# Allegro board sh-z-003_nc.brd
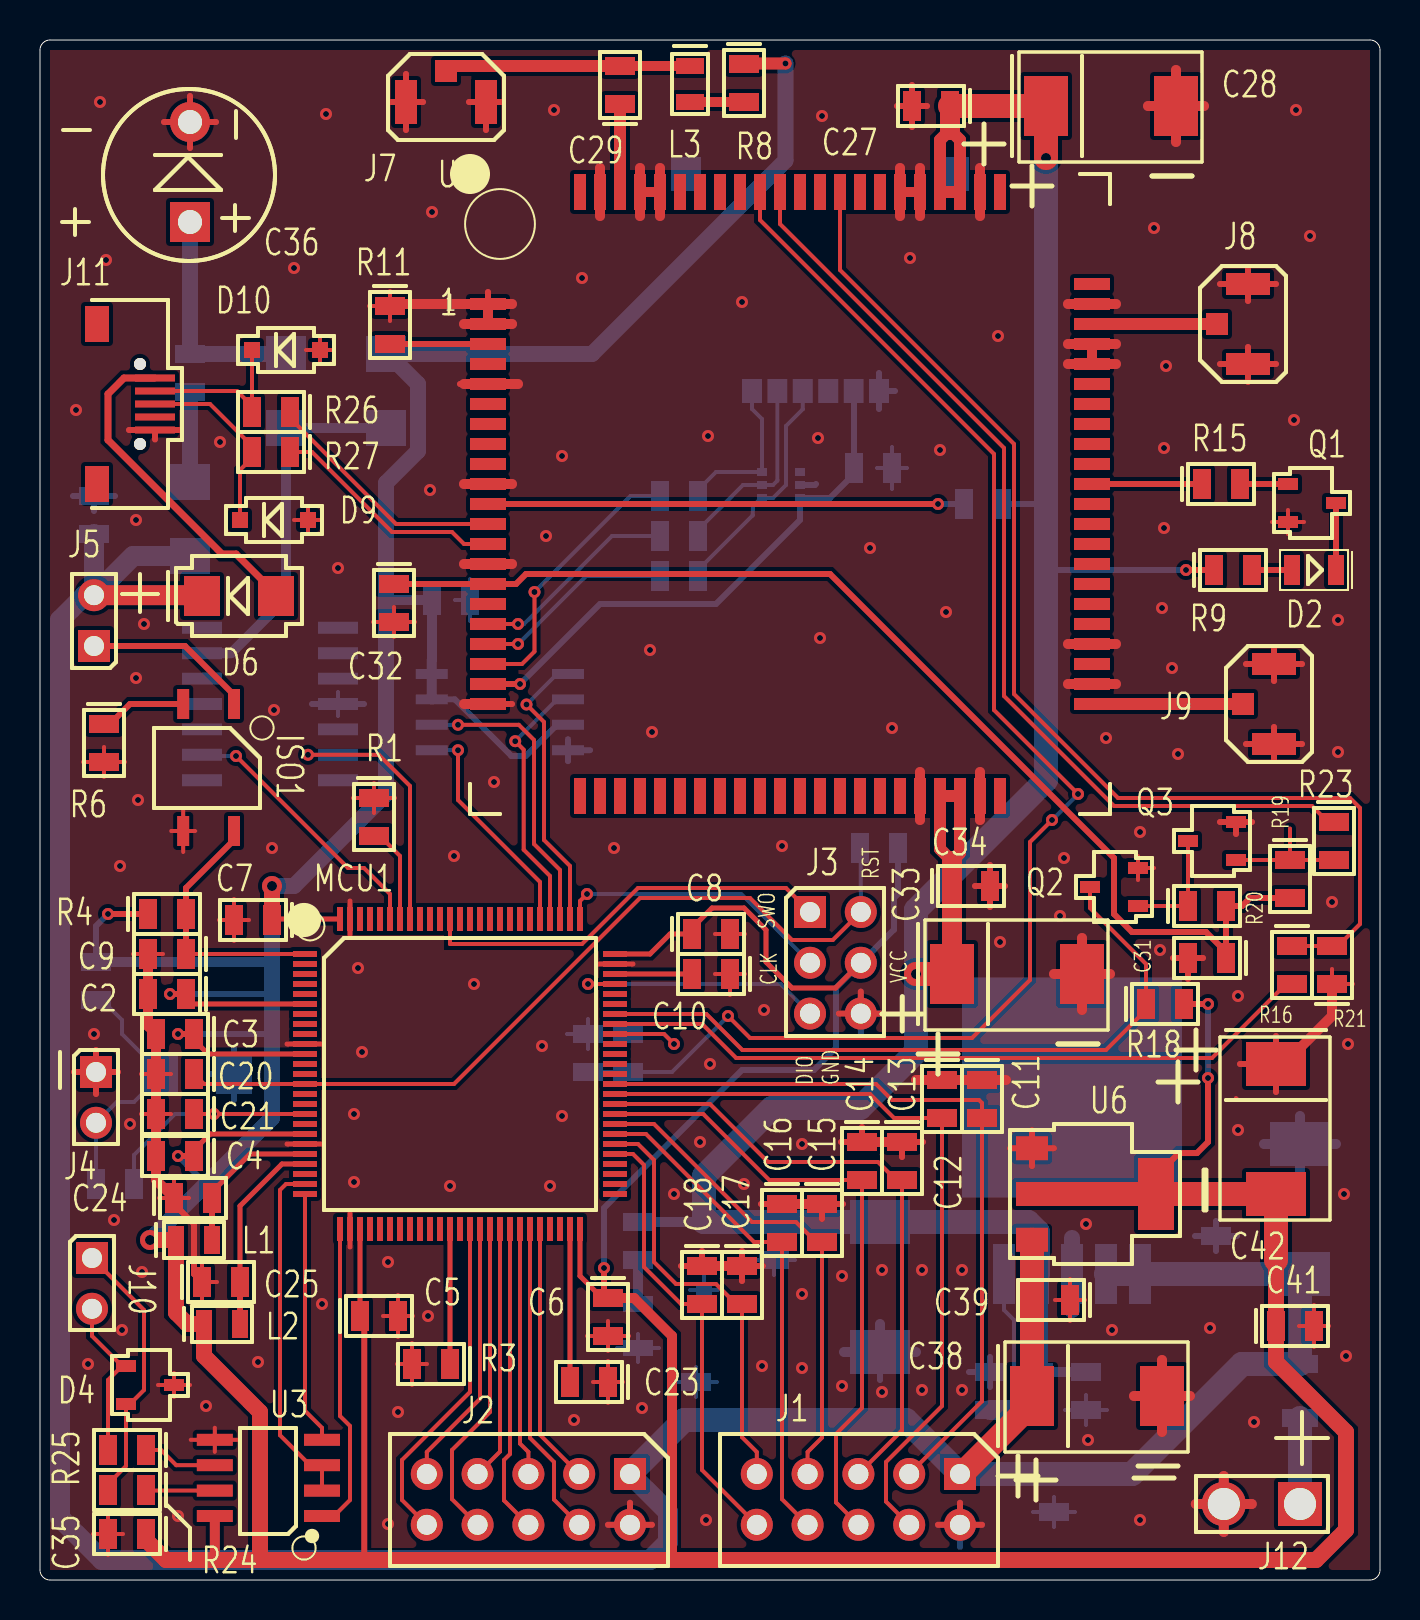
[diagram p0: board, top side]
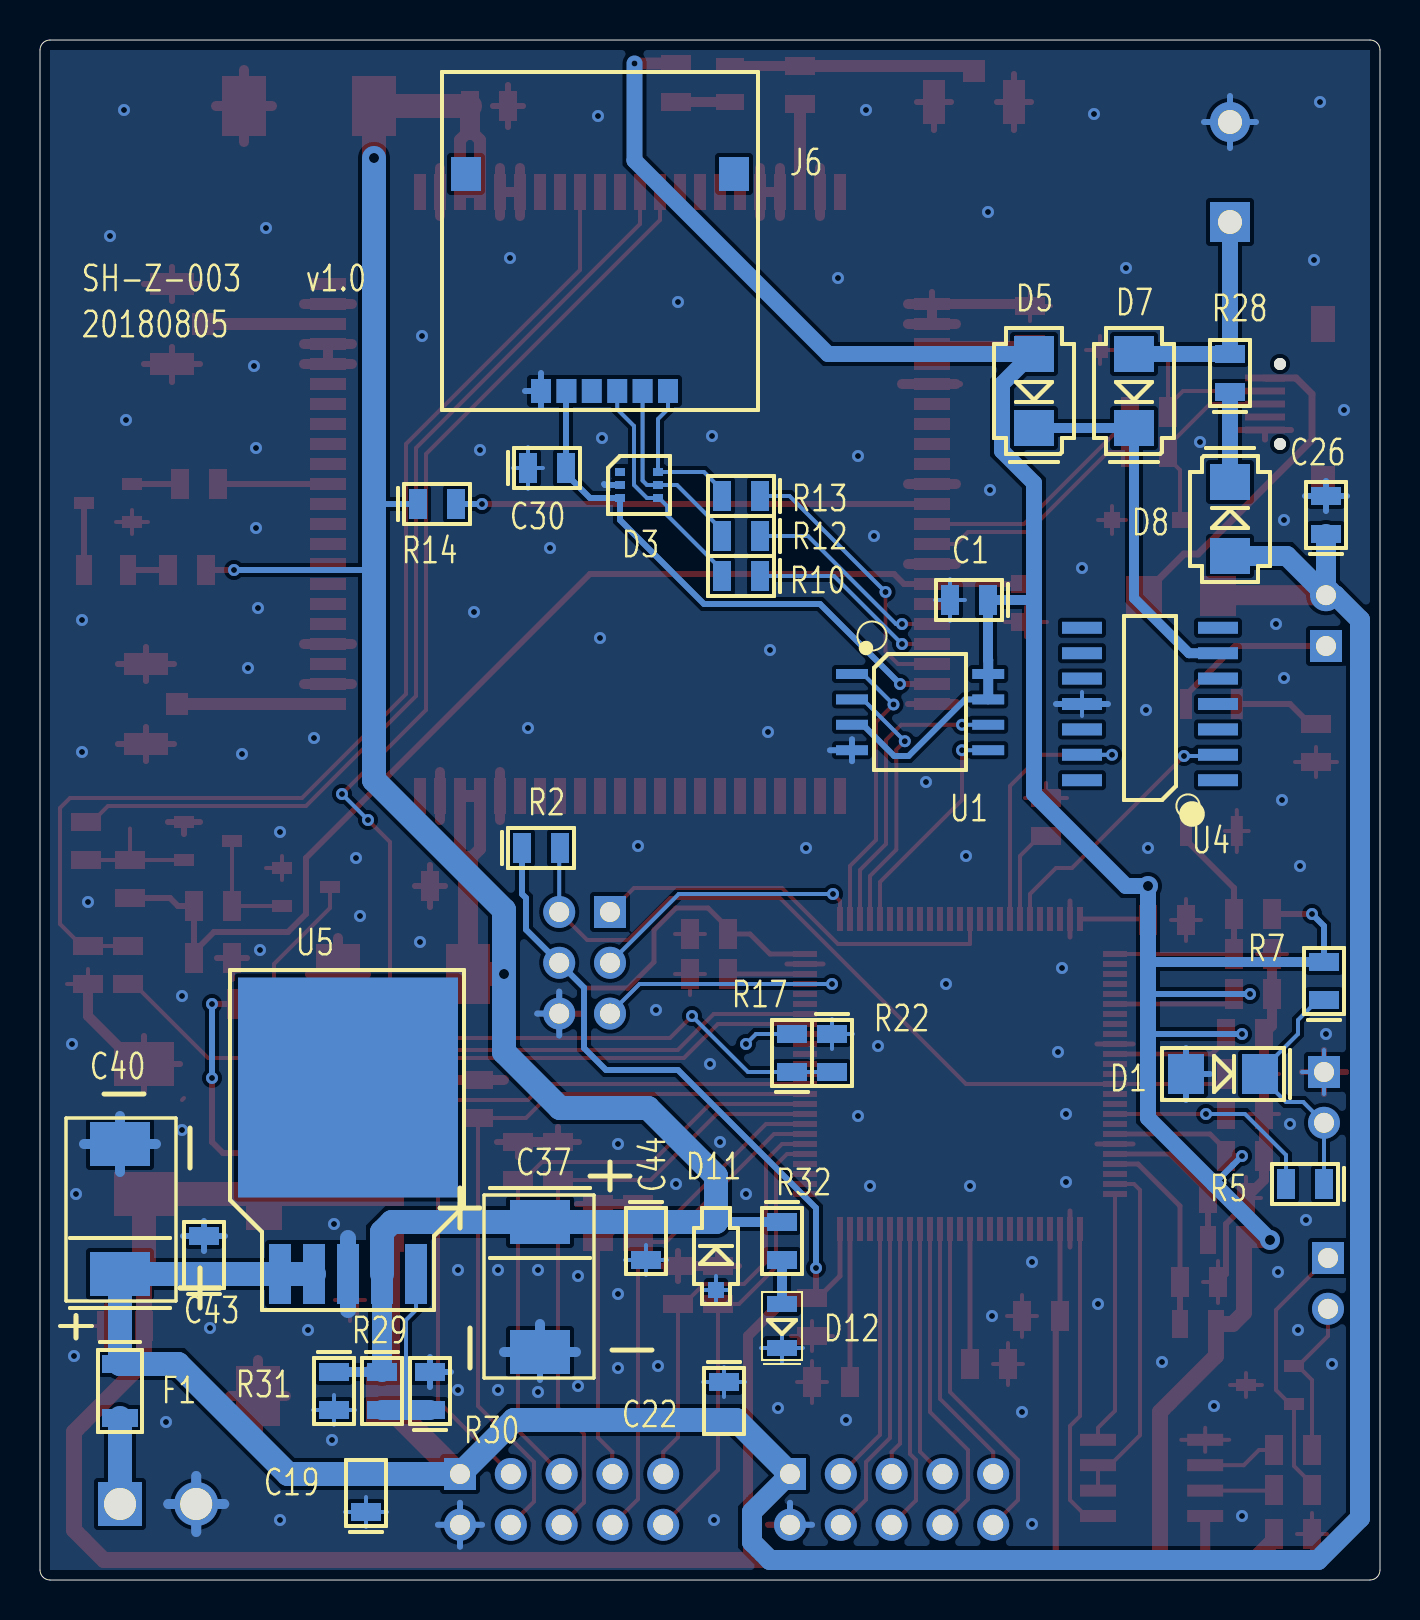
[diagram p1: board, bottom side, seen from below]

Outline 67 x 77 mm; copper layers: TOP, BOTTOM. Coordinates in mm from the lower left corner of the outline.
Outline path: 0,76.5 0,0.5 arc(0.15,0.15) 0.5,0 66.5,0 arc(66.85,0.15) 67,0.5 67,76.5 arc(66.85,76.85) 66.5,77 0.5,77 arc(0.15,76.85) 0,76.5

## Design rules (mm)
constraint set DEFAULT: 

## Placement (name value [footprint] x y rotation side)
C1  100nF  [SMD_C_0805]  19.6 49 270 bottom
C2  100nF  [SMD_C_0805]  7.3 29.3 270 top
C3  100nF  [SMD_C_0805]  7.7 27.3 270 top
C4  100nF  [SMD_C_0805]  7.7 21.2 270 top
C5  100nF  [SMD_C_0805]  16 13.2 90 top
C6  100nF  [SMD_C_0805]  28.4 14.1 0 top
C7  100nF  [SMD_C_0805]  11.6 33 270 top
C8  100nF  [SMD_C_0805]  32.6 32.3 90 top
C9  100nF  [SMD_C_0805]  7.3 31.3 270 top
C10  10uF  [SMD_C_0805]  34.5 30.3 270 top
C11  100nF  [SMD_C_0805]  47.1 25 0 top
C12  100nF  [SMD_C_0805]  45.1 25 0 top
C13  100nF  [SMD_C_0805]  43.1 21.9 0 top
C14  100nF  [SMD_C_0805]  41.1 21.9 0 top
C15  100nF  [SMD_C_0805]  39.1 18.8 0 top
C16  100nF  [SMD_C_0805]  37.1 18.8 0 top
C17  100nF  [SMD_C_0805]  35.1 15.7 0 top
C18  100nF  [SMD_C_0805]  33.1 15.7 0 top
C19  10uF  [SMD_C_0805]  50.7 3.4 0 bottom
C20  100nF  [SMD_C_0805]  7.7 25.3 270 top
C21  100nF  [SMD_C_0805]  7.7 23.3 270 top
C22  10uF  [SMD_C_0805]  32.8 9.9 180 bottom
C23  10uF  [SMD_C_0805]  28.4 9.9 270 top
C24  100nF  [SMD_C_0805]  6.7 19.1 90 top
C25  100nF  [SMD_C_0805]  8.1 14.9 90 top
C26  1uF  [SMD_C_0805]  2.7 52.3 0 bottom
C27  1uF  [SMD_C_0805]  45.5 73.7 270 top
C28  330uF  [SMD_C_P_7343]  55.6 73.7 90 top
C29  33pF  [SMD_C_0805]  29 73.8 180 top
C30  100nF  [SMD_C_0805]  42.6 55.6 90 bottom
C31  100nF  [SMD_C_0805]  59.3 31.1 270 top
C32  10uF  [SMD_C_0805]  17.7 49.8 0 top
C33  330uF  [SMD_C_P_7343]  50.9 30.3 90 top
C34  100nF  [SMD_C_0805]  45.6 34.7 90 top
C35  100nF  [SMD_C_0805]  5.3 2.3 270 top
C36  1F/5.5V  [DIP_2P_5MM]  7.5 67.9 90 top
C37  330uF  [SMD_C_P_7343]  42 12.6 180 bottom
C38  100uF  [SMD_C_P_7343]  54.9 9.2 90 top
C39  100nF  [SMD_C_0805]  51.5 14 270 top
C40  100uF  [SMD_C_P_7343]  63 20.6 0 bottom
C41  100nF  [SMD_C_0805]  61.8 12.7 90 top
C42  330uF  [SMD_C_P_7343]  61.8 20.5 0 top
C43  1uF  [SMD_C_0805]  58.8 15.3 0 bottom
C44  100nF  [SMD_C_0805]  36.7 17.9 180 bottom
D1  SMAJ6.5CA  [DO-214AC]  6 25.3 270 bottom
D2  GREEN  [SMD_D_0805]  64.7 50.5 270 top
D3  SMF05C  [SOT-363]  38 55.4 180 bottom
D4  SM712  [SOT23_D]  4.4 10.7 270 top
D5  SS32F  [SMAF]  17.3 57.6 0 bottom
D6  SS32F  [SMAF]  8.1 49.2 90 top
D7  SS32F  [SMAF]  12.3 57.6 0 bottom
D8  SS32F  [SMAF]  7.5 54.9 180 bottom
D9  5.1V  [SOD123]  10 53 90 top
D10  5.1V  [SOD123]  10.6 61.5 90 top
D11  5.1V  [SOD123]  33.2 17.9 180 bottom
D12  RED  [SMD_D_0805]  29.9 11.7 0 bottom
F1  2A  [SMD_R_1206]  63 10.8 180 bottom
ISO1  EL357NB  [EL357N]  9.7 43.8 270 top
J1  DI  [C2X5]  46 5.3 270 top
J2  Relay  [C2X5]  29.5 5.3 270 top
J3  SWD  [C2X3]  38.5 33.4 0 top
J4  ELS  [C1X2NEW]  2.8 25.4 0 top
J5  DOOR  [C1X2NEW]  2.7 46.7 180 top
J6  MICRO SIM  [MICRO-SIM]  45.7 70.3 180 bottom
J7  GPS  [IPX]  20.3 73.9 180 top
J8  3G  [IPX]  60.4 62.8 270 top
J9  4G  [IPX]  61.7 43.8 270 top
J10  RS485  [C1X2NEW]  2.6 16.1 0 top
J11  USB_Socket  [MICROUSB_2FIX]  5.5 58.8 270 top
J12  PWR  [C1X2_P381]  63 3.8 270 top
L1  bead  [SMD_L_0805]  6.8 17 90 top
L2  bead  [SMD_L_0805]  8.2 12.8 90 top
L3  47nH  [SMD_L_0805]  32.5 75.7 0 top
MCU1  STM32F407VET6  [LQFP100]  21 25.3 0 top
Q1  BC817-40  [SOT23_BC807]  62.5 54.8 270 top
Q2  BC817-40  [SOT23_BC807]  54.8 33.7 90 top
Q3  BC817-40  [SOT23_BC807]  59.7 36 90 top
R1  10K  [SMD_R_0805]  16.7 39.1 0 top
R2  10K  [SMD_R_0805]  42.9 36.6 90 bottom
R3  10K  [SMD_R_0805]  20.5 10.8 270 top
R4  2K  [SMD_R_0805]  5.4 33.3 90 top
R5  1K  [SMD_R_0805]  2.8 19.8 270 bottom
R6  1K  [SMD_R_0805]  3.2 42.8 0 top
R7  10K  [SMD_R_0805]  2.8 29 0 bottom
R8  10R  [SMD_R_0805]  35.2 75.8 0 top
R9  1K  [SMD_R_0805]  58.7 50.5 90 top
R10  22R  [SMD_R_0805]  31 50.2 270 bottom
R11  0R  [SMD_R_0805]  17.5 63.7 0 top
R12  22R  [SMD_R_0805]  31 52.2 270 bottom
R13  22R  [SMD_R_0805]  31 54.2 270 bottom
R14  0R  [SMD_R_0805]  48.1 53.8 90 bottom
R15  4.7K  [SMD_R_0805]  58.1 54.8 90 top
R16  1K  [SMD_R_0805]  62.6 31.7 0 top
R17  1K  [SMD_R_0805]  29.4 25.4 0 bottom
R18  4.7K  [SMD_R_0805]  55.3 28.8 90 top
R19  47K  [SMD_R_0805]  62.5 36 0 top
R20  4.7K  [SMD_R_0805]  57.4 33.7 90 top
R21  1.2K  [SMD_R_0805]  64.6 29.8 180 top
R22  1.2K  [SMD_R_0805]  27.4 27.3 180 bottom
R23  1K  [SMD_R_0805]  64.7 37.9 0 top
R24  10R  [SMD_R_0805]  5.3 4.5 270 top
R25  10R  [SMD_R_0805]  5.3 6.5 270 top
R26  22R  [SMD_R_0805]  12.5 58.4 270 top
R27  22R  [SMD_R_0805]  12.5 56.4 270 top
R28  10R  [SMD_R_0805]  7.5 59.4 0 bottom
R29  100K  [SMD_R_0805]  49.9 10.4 180 bottom
R30  47K  [SMD_R_0805]  47.5 8.5 0 bottom
R31  470R  [SMD_R_0805]  52.3 10.4 180 bottom
R32  1K  [SMD_R_0805]  29.9 17.9 180 bottom
U1  W25Q64  [SOIC8_208MIL]  26 45.3 180 bottom
U2  -  [SIM7600CE]  22.5 69.3 0 top
U3  SN65HVD72DR  [SOIC8]  14.1 3.2 180 top
U4  RX-8025SA  [SOP14]  11.5 43.8 0 bottom
U5  MIC29302  [TO263_5LEAD]  55 16.3 180 bottom
U6  AMS1117-33  [SOT-223]  53 19.3 270 top

## Library data of the parts
C1-C27 C29-C32 C34 C35 C39 C41 C43 C44 = CAP NP
C28 C33 C36-C38 C40 C42 = CAP POL
D1 = DIODE TS
D2 D12 = LED
D3 = SMF05C
D4 = SM712
D5-D8 = DIODE
D9-D11 = DIODE TVS
F1 = FUSE
ISO1 = OPT_sgl_0
J1 J2 = C2X5
J3 = C2X3
J4 J5 J10 J12 = C1X2
J6 = SIM_card_slot_2
J7-J9 = IPX_0
J11 = MicroUSB_Socket
L1-L3 = INDUCTOR
MCU1 = STM32F407VET
Q1-Q3 = NPN BEC
R1-R32 = RESISTOR
U1 = GD25Q64C
U2 = SIM7600CE
U3 = SN65HVD72DR
U4 = RX-8025SA_2
U5 = MIC29302
U6 = AMS1117-33

## Footprints (pads in the part's own frame, mm; a bottom-side part is the same pattern mirrored in y, then rotated)
C1X2_P381
  rect 2.2x2.2 hole 1.6: 1(0,0)
  round 2.2 hole 1.6: 2(0,-3.81)
C1X2NEW
  rect 1.6x1.6 hole 1: 1(0,0)
  round 1.6 hole 1: 2(0,-2.54)
C2X3
  rect 1.6x1.6 hole 1: 1(0,0)
  round 1.6 hole 1: 2(0,-2.54) 3(0,-5.08) 4(2.54,-5.08) 5(2.54,-2.54) 6(2.54,0)
C2X5
  rect 1.6x1.6 hole 1: 1(0,0)
  round 1.6 hole 1: 2(0,-2.54) 3(0,-5.08) 4(0,-7.62) 5(0,-10.16) 6(2.54,-10.16) 7(2.54,-7.62) 8(2.54,-5.08) 9(2.54,-2.54) 10(2.54,0)
DIP_2P_5MM
  rect 2x2 hole 1.2: 1(0,0)
  round 2 hole 1.2: 2(5,0)
DO-214AC
  rect 2x1.8 smd: 1(0,0) 2(0,-3.7)
EL357N
  rect 1.5x0.6 smd: 1(0,0) 2(0,-2.54) 3(6.35,-2.54) 4(6.35,0)
IPX
  rect 1.1x2.2 smd: 1(-2,0) 3(2,0)
  rect 1.1x1.1 smd: 2(0,-1.55)
LQFP100
  rect 1.2x0.3 smd: 1(-7.75,6) 2(-7.75,5.5) 3(-7.75,5) 4(-7.75,4.5) 5(-7.75,4) 6(-7.75,3.5) 7(-7.75,3) 8(-7.75,2.5) 9(-7.75,2) 10(-7.75,1.5) 11(-7.75,1) 12(-7.75,0.5) 13(-7.75,0) 14(-7.75,-0.5) 15(-7.75,-1) 16(-7.75,-1.5) 17(-7.75,-2) 18(-7.75,-2.5) 19(-7.75,-3) 20(-7.75,-3.5) 21(-7.75,-4) 22(-7.75,-4.5) 23(-7.75,-5) 24(-7.75,-5.5) 25(-7.75,-6) 51(7.75,-6) 52(7.75,-5.5) 53(7.75,-5) 54(7.75,-4.5) 55(7.75,-4) 56(7.75,-3.5) 57(7.75,-3) 58(7.75,-2.5) 59(7.75,-2) 60(7.75,-1.5) 61(7.75,-1) 62(7.75,-0.5) 63(7.75,0) 64(7.75,0.5) 65(7.75,1) 66(7.75,1.5) 67(7.75,2) 68(7.75,2.5) 69(7.75,3) 70(7.75,3.5) 71(7.75,4) 72(7.75,4.5) 73(7.75,5) 74(7.75,5.5) 75(7.75,6)
  rect 0.3x1.2 smd: 26(-6,-7.75) 27(-5.5,-7.75) 28(-5,-7.75) 29(-4.5,-7.75) 30(-4,-7.75) 31(-3.5,-7.75) 32(-3,-7.75) 33(-2.5,-7.75) 34(-2,-7.75) 35(-1.5,-7.75) 36(-1,-7.75) 37(-0.5,-7.75) 38(0,-7.75) 39(0.5,-7.75) 40(1,-7.75) 41(1.5,-7.75) 42(2,-7.75) 43(2.5,-7.75) 44(3,-7.75) 45(3.5,-7.75) 46(4,-7.75) 47(4.5,-7.75) 48(5,-7.75) 49(5.5,-7.75) 50(6,-7.75) 76(6,7.75) 77(5.5,7.75) 78(5,7.75) 79(4.5,7.75) 80(4,7.75) 81(3.5,7.75) 82(3,7.75) 83(2.5,7.75) 84(2,7.75) 85(1.5,7.75) 86(1,7.75) 87(0.5,7.75) 88(0,7.75) 89(-0.5,7.75) 90(-1,7.75) 91(-1.5,7.75) 92(-2,7.75) 93(-2.5,7.75) 94(-3,7.75) 95(-3.5,7.75) 96(-4,7.75) 97(-4.5,7.75) 98(-5,7.75) 99(-5.5,7.75) 100(-6,7.75)
MICRO-SIM
  rect 1.5x1.7 smd: 1(0,0) 8(13.4,0)
  rect 1x1.2 smd: 2(3.75,-10.85) 3(5.02,-10.85) 4(6.29,-10.85) 5(7.56,-10.85) 6(8.83,-10.85) 7(10.1,-10.85)
MICROUSB_2FIX
  round 0.6 hole 0.6 unplated: (-2,-0.5) (2,-0.5)
  rect 0.35x2 smd: 1(-1.3,0.25) 2(-0.65,0.25) 3(0,0.25) 4(0.65,0.25) 5(1.3,0.25)
  rect 1.8x1.2 smd: 6(4,-2.65) 7(-4,-2.65)
SIM7600CE
  rect 1.8x0.6 smd: 1(-0.1,-5.5) 2(-0.1,-6.5) 3(-0.1,-7.5) 4(-0.1,-8.5) 5(-0.1,-9.5) 6(-0.1,-10.5) 7(-0.1,-11.5) 8(-0.1,-12.5) 9(-0.1,-13.5) 10(-0.1,-14.5) 11(-0.1,-15.5) 12(-0.1,-16.5) 13(-0.1,-17.5) 14(-0.1,-18.5) 15(-0.1,-19.5) 16(-0.1,-20.5) 17(-0.1,-21.5) 18(-0.1,-22.5) 19(-0.1,-23.5) 20(-0.1,-24.5) 41(30.1,-24.5) 42(30.1,-23.5) 43(30.1,-22.5) 44(30.1,-21.5) 45(30.1,-20.5) 46(30.1,-19.5) 47(30.1,-18.5) 48(30.1,-17.5) 49(30.1,-16.5) 50(30.1,-15.5) 51(30.1,-14.5) 52(30.1,-13.5) 53(30.1,-12.5) 54(30.1,-11.5) 55(30.1,-10.5) 56(30.1,-9.5) 57(30.1,-8.5) 58(30.1,-7.5) 59(30.1,-6.5) 60(30.1,-5.5) 81(-0.1,-25.5) 82(30.1,-25.5) 85(30.1,-4.5)
  rect 0.6x1.8 smd: 21(5.5,-30.1) 22(6.5,-30.1) 23(7.5,-30.1) 24(8.5,-30.1) 25(9.5,-30.1) 26(10.5,-30.1) 27(11.5,-30.1) 28(12.5,-30.1) 29(13.5,-30.1) 30(14.5,-30.1) 31(15.5,-30.1) 32(16.5,-30.1) 33(17.5,-30.1) 34(18.5,-30.1) 35(19.5,-30.1) 36(20.5,-30.1) 37(21.5,-30.1) 38(22.5,-30.1) 39(23.5,-30.1) 40(24.5,-30.1) 61(24.5,0.1) 62(23.5,0.1) 63(22.5,0.1) 64(21.5,0.1) 65(20.5,0.1) 66(19.5,0.1) 67(18.5,0.1) 68(17.5,0.1) 69(16.5,0.1) 70(15.5,0.1) 71(14.5,0.1) 72(13.5,0.1) 73(12.5,0.1) 74(11.5,0.1) 75(10.5,0.1) 76(9.5,0.1) 77(8.5,0.1) 78(7.5,0.1) 79(6.5,0.1) 80(5.5,0.1) 83(25.5,-30.1) 84(4.5,-30.1) 86(4.5,0.1) 87(25.5,0.1)
SMAF
  rect 2x1.8 smd: 1(0,0) 2(0,-3.7)
SMD_C_0805
  rect 1.5x0.9 smd: 1(0,0) 2(0,-1.9)
SMD_C_P_7343
  rect 3x2.2 smd: 1(0,5.3) 2(0,-1.2)
SMD_D_0805
  rect 1.5x0.8 smd: 1(0,0.1) 2(0,-2.1)
SMD_L_0805
  rect 1.4x0.8 smd: 1(0,0) 2(0,-1.8)
SMD_R_0805
  rect 1.5x0.9 smd: 1(0,0) 2(0,-1.9)
SMD_R_1206
  rect 1.8x0.9 smd: 1(0,0) 2(0,-2.7)
SOD123
  rect 0.8x0.8 smd: 1(0,0) 2(0,-3.4)
SOIC8
  rect 1.8x0.6 smd: 1(0,0) 2(0,-1.27) 3(0,-2.54) 4(0,-3.81) 5(5.36,-3.81) 6(5.36,-2.54) 7(5.36,-1.27) 8(5.36,0)
SOIC8_208MIL
  rect 1.6x0.5 smd: 1(-0.4,0) 2(-0.4,-1.27) 3(-0.4,-2.54) 4(-0.4,-3.81) 5(6.41,-3.81) 6(6.41,-2.54) 7(6.41,-1.27) 8(6.41,0)
SOP14
  rect 2x0.6 smd: 1(-3.4,3.81) 2(-3.4,2.54) 3(-3.4,1.27) 4(-3.4,0) 5(-3.4,-1.27) 6(-3.4,-2.54) 7(-3.4,-3.81) 8(3.4,-3.81) 9(3.4,-2.54) 10(3.4,-1.27) 11(3.4,0) 12(3.4,1.27) 13(3.4,2.54) 14(3.4,3.81)
SOT23_BC807
  rect 0.6x1 smd: 1(0,-0.1) 2(1.9,-0.1) 3(0.95,2.3)
SOT23_D
  rect 0.6x1 smd: 1(0,-0.1) 2(1.9,-0.1) 3(0.95,2.3)
SOT-223
  rect 1.2x1.6 smd: 1(-2.29,-3.4) 2(0,-3.4) 3(2.29,-3.4)
  rect 3.6x1.8 smd: 4(0,2.8)
SOT-363
  rect 0.5x0.4 smd: 1(0,0) 2(0,-0.65) 3(0,-1.3) 4(1.9,-1.3) 5(1.9,-0.65) 6(1.9,0)
TO263_5LEAD
  rect 11x11 smd: (3.4,8.325)
  rect 1.1x3 smd: 1(0,-1) 2(1.7,-1) 3(3.4,-1) 4(5.1,-1) 5(6.8,-1)

## Nets
1.8V: C31.1 C32.1 R19.2 R20.2 U2.15
3.3V: C1.1 C2.1 C3.1 C4.1 C5.1 C6.1 C7.1 C8.1 C35.1 C41.1 C42.2 D5.2 J3.5 L1.1 L2.1 MCU1.6 MCU1.11 MCU1.19 MCU1.28 MCU1.50 MCU1.75 MCU1.100 R2.1 R4.1 R7.2 R8.1 R18.2 U1.3(WP#) U1.7 U1.8 U3.8(VCC) U6.2 U6.4(VOUT#4)
5V: C19.2 C22.2 C26.1 C38.1 C39.2 C40.1 C43.1 D6.1(K) D8.2 F1.1 J1.1 J2.1 J5.2 U5.1 U5.2 U6.3
GND: C1.2 C2.2 C3.2 C4.2 C5.2 C6.2 C7.2 C8.2 C9.2 C10.1 C11.1 C12.1 C13.1 C14.1 C15.1 C16.1 C17.1 C18.1 C19.1 C20.2 C21.2 C22.1 C23.1 C24.1 C25.1 C26.2 C27.2 C28.2 C30.1 C31.2 C32.2 C33.2 C34.2 C35.2 C36.2 C37.2 C38.2 C39.1 C40.2 C41.2 C42.1 C43.2 C44.2 D1.2 D3.2 D4.3 D9.2 D10.2 D11.2 D12.1(CATHODE) ISO1.3 J1.10 J2.10 J3.4 J4.1 J6.2 J7.1 J7.3 J8.1 J8.3 J9.1 J9.3 J11.5 J12.2 MCU1.10 MCU1.20(VSSA) MCU1.27 MCU1.74 MCU1.99 Q1.2(E) Q2.2(E) Q3.2(E) R1.1 R3.2 R6.2 R11.1 R21.1 R22.1 R30.2 R31.2 U1.4 U2.1 U2.2 U2.5 U2.10 U2.14 U2.37 U2.40 U2.41 U2.43 U2.57 U2.58 U2.60 U2.61 U2.64 U2.65 U2.77 U2.78 U2.80 U2.81 U3.5 U4.11 U5.3 U6.1
VBAT: C27.1 C28.1 C33.1 C34.1 C37.1 C44.1 D11.1(CATHODE) R9.1 R14.1 R29.1 R31.1 R32.1 U2.38 U2.39 U2.62 U2.63 U5.4(OUT)
VDD_EXT: U2.44(VDD_EXT)
VDDA: C25.2 L2.2 MCU1.22
AI_ELS: C21.1 MCU1.17 R5.2
C: D3.1
DI_DOOR: ISO1.1 J5.1
DI_TTL_0: C18.2 J1.6 MCU1.55
DI_TTL_1: C17.2 J1.5 MCU1.56
DI_TTL_2: C16.2 J1.7 MCU1.57
DI_TTL_3: C15.2 J1.4 MCU1.58
DI_TTL_4: C14.2 J1.8 MCU1.59
DI_TTL_5: C13.2 J1.3 MCU1.60
DI_TTL_6: C12.2 J1.9 MCU1.61
DI_TTL_7: C11.2 J1.2 MCU1.62
FLASH_CS: MCU1.77 U1.1
FLASH_MISO: MCU1.79 U1.2
FLASH_MOSI: MCU1.80 U1.5
FLASH_SCK: MCU1.78 U1.6
MCU_DOOR: C9.1 ISO1.4 MCU1.1 R4.2
MCU_I2C_SCL: MCU1.95 U4.2
MCU_I2C_SDA: MCU1.93 U4.13
MCU_RS485_DIR: MCU1.24 U3.2 U3.3
MCU_RS485_RX: MCU1.26 U3.1
MCU_RS485_TX: MCU1.25 U3.4
MCU_RX: MCU1.69 Q2.3 R18.1
MCU_TX: MCU1.68 R16.2
MCU_WAKE: MCU1.67 R17.2
RELAY_0: J2.6 MCU1.39
RELAY_1: J2.5 MCU1.40
RELAY_2: J2.7 MCU1.41
RELAY_3: J2.4 MCU1.42
RELAY_4: J2.8 MCU1.43
RELAY_5: J2.3 MCU1.44
RELAY_6: J2.9 MCU1.45
RELAY_7: J2.2 MCU1.46
RST: C20.1 J3.6 MCU1.14 R2.2
SIM_CLK: R13.1 U2.19
SIM_DATA: R12.1 U2.17
SIM_RST: R10.1 U2.18
SIM_RX: R16.1 R21.2 U2.68
SIM_S_CLK: D3.6(C#6) J6.7 R13.2
SIM_S_DAT: D3.5 J6.6 R12.2
SIM_S_RST: D3.4 J6.5 R10.2
SIM_TX: R23.1 U2.71
SIM_VDD: C30.2 D3.3 J6.3 U2.20
SIM_WAKE: R17.1 R22.2 U2.72
SWCLK: J3.2 MCU1.76
SWDIO: J3.3 MCU1.72
SWO: J3.1 MCU1.89
USB+: D9.1(CATHODE) J11.3 R27.2
USB-: D10.1(CATHODE) J11.2 R26.2
USB_DN: R26.1 U2.12
USB_DP: R27.1 U2.13
VREF: C24.2 L1.2 MCU1.21
N3822170: R29.2 R30.1 U5.5
N4598241: D6.2 J11.1
N4601647: Q3.1 R19.1 R23.2
N4601708: Q2.1 Q3.3 R20.1
N4604082: R14.2 U2.11
N4608034: D12.2 R32.2
N4608505: R15.1 U2.51
N4608569: D2.2 R9.2
N4608751: D2.1(CATHODE) Q1.3
N4615628: J9.2(RF) U2.82
N4615862: L3.2 R8.2
N4615877: C29.2 J7.2(RF) L3.1
N4616222: C29.1 U2.79
N4618532: R11.2 U2.3
N4620570: J8.2(RF) U2.59
N4627929: MCU1.94 R1.2
N4628349: C10.2 MCU1.73
N4629105: MCU1.37 R3.1
N4629113: C23.2 MCU1.49
N4630760: F1.2 J12.1
N4647441: ISO1.2 R6.1
N4652652: D1.1(CATHODE) J4.2 R5.1 R7.1
N4656319: R24.1 U3.7
N4656323: R25.1 U3.6
N4656558: D4.2(IO#2) J10.1 R24.2
N4656597: D4.1 J10.2 R25.2
N4660261: D5.1(K) D7.1(K) U4.6(VDD)
N4660838: D8.1(K) R28.1
N4661685: C36.1 D7.2 R28.2
N46081840: Q1.1 R15.2

Pads without a net: J6 1 4 8; J11 4 6 7; MCU1 2 3 4 5 7 8 9 12 13 15 16 18 23 29 30 31 32 33 34 35 36 38 47 48 51 52 53 54 63 64 65 66 70 71 81 82 83 84 85 86 87 88 90 91 92 96 97 98; U2 4 6 7 8 9 16 21 22 23 24 25 26 27 28 29 30 31 32 33 34 35 36 42 45 46 47 48 49 50 52 53 54 55 56 66 67 69 70 73 74 75 76 83 84 85 86 87; U4 1 3 4 5 7 8 9 10 12 14

## Via types
v1: diameter 0.6, hole 0.3, TOP to BOTTOM, 137 vias
v2: diameter 1, hole 0.5, TOP to BOTTOM, 4 vias

## Routing (per net, layer and track width the routed paths; a pad name or vN(x,y) marks a point on that pad's centre or on a via; arc(x,y) is an arc through that point)
1.8V: length 57.2
  TOP w0.3: 59.3,31.4 R20.2 60.1,33.7 60.5,34.1 R19.2 ; 59.3,31.4 58.3,32.4 54.6,32.4 53.7,33.3 53.7,36.1 39.5,50.3 24.3,50.3 23.8,49.8 U2.15 C32.1 ; 59.3,31.4 C31.1
3.3V: length 358.5
  TOP w0.25: C4.1 7.7,21.5 8.5,22.3 MCU1.19 ; MCU1.75 30.5,31.3 31.5,32.3 C8.1 32.6,32.6 33.6,33.6 35.2,33.6 36.3,32.5 36.3,30.9 37.6,29.6 39.78,29.6 J3.5 ; MCU1.50 27,15.2 28.1,14.1 C6.1 ; MCU1.100 11.65,33.05 C7.1 ; C2.1 7.3,29.07 7.58,28.8 MCU1.6 ; C3.1 7.7,27 8.4,26.3 MCU1.11 ; MCU1.28 C5.1
  TOP w0.3: C5.1 16.21,12.99 16.21,1.01 16.2,1 ; C4.1 v1(6.9,21.2) ; C3.1 v1(6.9,27.3) ; C6.1 28.2,14.3 v1(28.2,15.6) ; U6.4 55.8,20.2 56.95,21.35 57.85,21.35 58.4,21.9 v1(58.4,25.1) ; R4.1 v1(3.4,33.3) ; C2.1 v1(6.5,29.3) ; R18.2 v1(58.4,28.8)
  TOP w0.5: 8.7,1 8.74,1.04 U3.8 ; 31.6,1 31.6,12.2 29.7,14.1 C6.1
  TOP w0.6: R8.1 35.23,75.83 v1(37.27,75.83)
  TOP w0.8: 11,1 11,8.4 8.2,11.2 L2.1 7.37,12.8 6.8,13.37 L1.1 v2(5.5,17) ; 11,1 6.3,1 5.3,2 C35.1 ; 11,1 63.8,1 65.3,2.5 65.3,7.4 61.8,10.9 C41.1 61.8,16 ; v2(11.6,34.7) C7.1
  TOP w1.2: 61.8,16 C42.2 U6.4 U6.2
  BOTTOM w0.3: U1.7 20.74,44.03 23.57,41.2 24.29,41.2 25.85,42.76 U1.3 ; R2.1 42.9,34.3 42.7,34.1 42.7,32.52 J3.5 39.8,29.62 39.8,26.6 38.7,25.5 35.1,25.5 28.2,18.6 v1(28.2,15.6) ; v1(58.4,28.8) v1(58.4,25.1) ; v1(6.9,21.2) 7.36,20.74 8.3,19.8 ; v1(3.4,33.3) 2.8,32.7 R7.2 ; v1(6.9,27.3) 11.6,27.3 ; 11.6,29.3 v1(6.5,29.3)
  BOTTOM w0.5: U1.7 U1.8 19.59,46 19.6,46.01 C1.1 17.3,49 ; 11.6,30.9 R7.2
  BOTTOM w0.8: 17.4,61.3 27.6,61.3 37.27,70.97 v1(37.27,75.83) ; 17.4,61.3 D5.2 ; 17.4,61.3 18.9,59.8 18.9,56.45 17.3,54.85 17.3,39.3 12.7,34.7 v2(11.6,34.7) 11.6,23.1 v2(5.5,17)
5V: length 162.5
  TOP w1: D6.1 7.4,49.2 7.36,49.24 J5.2
  TOP w1.2: U6.3 C39.2 C38.1 49.6,8.8 46.1,5.3 J1.1
  BOTTOM w1: J5.2 2.24,49.24 1,48 1,3.1 3.1,1 30.5,1 31.4,1.9 31.4,3.4 J2.1 ; J5.2 4.66,51.2 D8.2 ; J5.2 C26.1
  BOTTOM w1.2: U5.2 U5.1 C43.1 C40.1 F1.1 60.1,10.8 54.6,5.3 C19.2 J1.1 43.3,8 C22.2 32.2,8 J2.1
GND: length 373.4
  TOP w0.2: D10.2 14,62.2 ; D10.2 13.3,61.5 ; D10.2 14.7,61.5 ; D10.2 14,60.8 ; Q2.2 54.9,36.2 ; Q2.2 55.7,35.6 ; Q2.2 54.9,35 ; C7.2 9.7,34.05 ; C7.2 10.45,33 ; C7.2 9.7,31.95 ; C7.2 8.95,33 ; 6.55,25.3 C20.2 5.05,25.3 ; 5.05,23.3 C21.2 6.55,23.3 ; 64.6,30.55 R21.1 65.65,29.8 ; 17.5,62.95 R11.1 ; R11.1 17.5,64.45 ; R11.1 16.45,63.7 ; 13.4,52.3 D9.2 ; D9.2 12.7,53 ; D9.2 14.1,53 ; D9.2 13.4,53.7 ; C6.2 28.4,12.95 ; C6.2 27.35,12.2 ; C6.2 29.45,12.2 ; C6.2 28.4,11.45 ; 33.75,32.3 C8.2 35.25,32.3 ; 62.4,52.3 Q1.2 ; Q1.2 62.4,53.5 ; Q1.2 63.2,52.9 ; Q1.2 61.6,52.9 ; 63.7,11.65 C41.2 ; C41.2 64.45,12.7 ; C41.2 62.95,12.7 ; C41.2 63.7,13.75 ; 2.65,2.3 C35.2 ; C35.2 3.4,1.25 ; C35.2 4.15,2.3 ; C35.2 3.4,3.35 ; 7.54,7.01 U3.5 ; U3.5 9.94,7.01 ; U3.5 8.74,7.61 ; U3.5 8.74,6.41 ; 16.65,47.9 C32.2 ; C32.2 18.75,47.9 ; C32.2 17.7,48.65 ; C32.2 17.7,47.15 ; 5.95,19.1 C24.1 ; C24.1 7.45,19.1 ; C24.1 6.7,20.15 ; D4.3 6.7,10.35 ; D4.3 6.7,9.15 ; D4.3 5.9,9.75 ; D4.3 7.5,9.75 ; ISO1.3 7.76,37.45 ; ISO1.3 7.16,38.5 ; ISO1.3 6.56,37.45 ; ISO1.3 7.16,36.4 ; 28.4,8.85 C23.1 ; C23.1 29.15,9.9 ; C23.1 27.65,9.9 ; C23.1 28.4,10.95 ; 17.15,13.2 C5.2 ; C5.2 18.65,13.2 ; C5.2 17.9,12.15 ; C5.2 17.9,14.25 ; C10.1 35.25,30.3 ; C10.1 33.75,30.3 ; C10.1 34.5,29.25 ; 18.6,9.75 R3.2 ; R3.2 18.6,11.85 ; R3.2 17.85,10.8 ; R3.2 19.35,10.8 ; C25.1 8.85,14.9 ; C25.1 8.1,15.95 ; C25.1 8.1,13.85 ; R6.2 3.2,41.65 ; R6.2 3.2,40.15 ; R6.2 2.15,40.9 ; R6.2 4.25,40.9 ; 59.8,24.1 59.9,24 ; 50.75,14 C39.1 ; C39.1 52.25,14 ; C39.1 51.5,12.95 ; C39.1 51.5,15.05 ; R1.1 17.75,39.1 ; R1.1 16.7,39.85 ; R1.1 15.65,39.1 ; R1.1 16.7,38.35 ; 4.65,31.3 C9.2 6.15,31.3
  TOP w0.25: 29.65,30.8 MCU1.74 27.85,30.8 ; 15.5,33.95 MCU1.99 15.5,32.15 ; 15.5,18.45 MCU1.27 15.5,16.65 ; 14.15,26.8 MCU1.10 12.35,26.8 ; 12.35,21.8 MCU1.20 14.15,21.8
  TOP w0.3: J7.3 18.3,72.5 ; J7.3 17.45,73.9 ; J7.3 19.15,73.9 ; J7.3 18.3,75.3 ; J9.1 63.1,45.8 ; J9.1 60.3,45.8 ; J9.1 61.7,44.95 ; J9.1 61.7,46.65 ; C17.1 36.15,15.7 ; C17.1 35.1,14.95 ; C17.1 35.1,16.45 ; C24.1 6.7,18.8 7.7,17.8 7.7,15.3 C25.1 ; 46.75,34.7 C34.2 ; C34.2 47.5,33.65 ; C34.2 47.5,35.75 ; C34.2 48.25,34.7 ; 4.45,57.5 J11.5 ; J11.5 5.75,57.02 ; J11.5 7.05,57.5 ; J8.3 61.8,60.8 ; J8.3 60.4,61.65 ; J8.3 60.4,59.9 ; J8.3 59,60.8 ; 60.4,65.65 J8.1 ; J8.1 60.4,63.95 ; J8.1 59,64.8 ; J8.1 61.8,64.8 ; 61.8,27.2 C42.1 ; C42.1 61.8,24.4 ; C42.1 60,25.8 ; C36.2 8.8,72.9 ; C36.2 7.5,71.6 ; C36.2 6.2,72.9 ; C36.2 7.5,74.2 ; Q3.2 59.8,37.3 ; Q3.2 59,37.9 ; Q3.2 60.6,37.9 ; C27.2 44.35,73.7 ; C27.2 42.85,73.7 ; C27.2 43.6,74.75 ; C27.2 43.6,72.65 ; J9.3 63.1,41.8 ; J9.3 60.3,41.8 ; J9.3 61.7,42.65 ; J9.3 61.7,40.95 ; C31.2 57.4,30.05 ; C31.2 56.65,31.1 ; C31.2 58.15,31.1 ; J3.4 39.94,28.32 ; J3.4 41.04,29.42 ; J3.4 42.14,28.32 ; 1.7,25.4 J4.1 ; J4.1 3.9,25.4 ; J4.1 2.8,24.3 ; J4.1 2.8,26.5 ; J7.1 22.3,72.5 ; J7.1 23.15,73.9 ; J7.1 21.45,73.9 ; 33.1,16.45 C18.1 32.05,15.7 ; 49.6,22.49 U6.1 ; U6.1 50.7,21.59 ; U6.1 49.6,20.69 ; U6.1 48.5,21.59 ; J1.10 47.1,2.76 ; J1.10 46,3.86 ; J1.10 44.9,2.76 ; 23.6,62.8 23.7,62.8 ; 44.15,21.9 C13.1 43.1,21.15 ; 40.05,21.9 C14.1 41.1,22.65 ; 21,59.8 21.2,59.8 ; 28.4,2.76 J2.10 ; J2.10 30.6,2.76 ; J2.10 29.5,3.86 ; 36.05,18.8 C16.1 ; 40.15,18.8 C15.1 39.1,18.05 ; U2.1 22.4,64.4 ; U2.81 23.6,43.8
  TOP w0.5: 21.2,54.8 U2.10 23.6,54.8 ; C9.2 C2.2 5.4,27.7 C3.2 C20.2 C21.2 C4.2 5.8,20 C24.1 ; 47,40.4 U2.40 47,38 ; U2.64 44,68.2 ; U2.64 44,70.6 ; U2.64 U2.65 ; 54.7,9.2 C38.2 ; C38.2 56.1,7.4 ; C38.2 56.1,11 ; C38.2 57.5,9.2 ; 47,70.6 U2.61 47,68.2 ; 30,70.6 U2.78 ; U2.78 30,68.2 ; U2.78 U2.77 ; 51.4,46.8 U2.43 53.8,46.8 ; 43,70.6 U2.65 ; U2.65 43,68.2 ; 48.3,25 C11.1 C12.1 43.8,25 ; R11.1 18,63.7 18.1,63.8 U2.1 ; 51.4,60.8 U2.57 ; U2.57 U2.58 ; U2.57 53.8,60.8 ; 50.7,30.3 C33.2 ; C33.2 52.1,32.1 ; C33.2 52.1,28.5 ; C33.2 53.5,30.3 ; 44,38 U2.37 44,40.4 ; 21.2,50.8 U2.14 23.6,50.8 ; U2.58 51.4,61.8 ; U2.58 53.8,61.8 ; U2.2 23.6,62.8 ; U2.2 21.2,62.8 ; U2.2 U2.1 ; 31,70.6 U2.77 ; U2.77 31,68.2 ; C42.1 62.2,25.8 64.6,28.2 R21.1 ; 59.19,5.2 J12.2 ; J12.2 59.19,2.4 ; J12.2 60.59,3.8 ; J12.2 57.79,3.8 ; 51.4,44.8 U2.41 53.8,44.8 ; 21.2,43.8 U2.81 ; C28.2 56.8,71.9 ; C28.2 58.2,73.7 ; C28.2 55.4,73.7 ; C28.2 56.8,75.5 ; 21.2,59.8 U2.5 23.9,59.8 ; C17.1 C18.1 ; U2.1 23.6,63.8 ; 28,70.6 U2.80 28,68.2 ; C14.1 C13.1 ; C16.1 C15.1 ; 53.8,63.8 U2.60 51.4,63.8
  BOTTOM w0.2: C19.1 50.7,4.15 ; C19.1 51.75,3.4 ; C19.1 50.7,2.65 ; C19.1 49.65,3.4 ; 21.5,47.95 C1.2 ; C1.2 22.25,49 ; C1.2 20.75,49 ; C1.2 21.5,50.05 ; D12.1 30.95,11.6 ; D12.1 29.9,12.3 ; D12.1 28.85,11.6 ; D12.1 29.9,10.9 ; C44.2 37.75,16 ; C44.2 36.7,15.25 ; C44.2 36.7,16.75 ; C44.2 35.65,16 ; C30.1 43.35,55.6 ; C30.1 42.6,56.65 ; C30.1 42.6,54.55 ; C30.1 41.85,55.6 ; J4.1 2.8,26.5 ; J4.1 3.9,25.4 ; J4.1 2.8,24.3 ; D11.2 33.9,14.5 ; D11.2 32.5,14.5 ; D11.2 33.2,15.2 ; D11.2 33.2,13.8 ; 14.9,43.2 U4.11 14.9,44.4 ; R31.2 53.35,8.5 ; R31.2 51.25,8.5 ; R31.2 52.3,9.25 ; R31.2 52.3,7.75 ; R22.1 27.4,28.05 ; R22.1 27.4,26.55 ; R22.1 26.35,27.3 ; 31.75,9.9 C22.1 ; C22.1 33.85,9.9 ; C22.1 32.8,9.15 ; C22.1 32.8,10.65
  BOTTOM w0.3: J6.2 41.95,60.35 ; J6.2 41.95,58.55 ; J6.2 42.75,59.45 ; R30.2 47.5,9.65 ; R30.2 46.45,10.4 ; R30.2 47.5,11.15 ; 7.5,74.2 C36.2 ; C36.2 8.8,72.9 ; C36.2 7.5,71.6 ; C36.2 6.2,72.9 ; 46,3.86 J1.10 ; J1.10 46,1.66 ; J1.10 47.1,2.76 ; J1.10 44.9,2.76 ; J3.4 42.14,28.32 ; J3.4 41.04,29.42 ; J3.4 41.04,27.22 ; 57.75,17.2 C43.2 ; C43.2 58.8,16.45 ; C43.2 58.8,17.95 ; C43.2 59.85,17.2 ; C37.2 42,10 ; C26.2 2.7,53.45 ; C26.2 1.65,54.2 ; C26.2 3.75,54.2 ; C26.2 2.7,54.95 ; 16.2,43.8 U4.11 13.6,43.8 ; 28.4,2.76 J2.10 29.5,3.86 ; U1.4 26.4,40.94 ; U1.4 27.5,41.49 ; U1.4 26.4,42.04 ; D1.2 9.7,26.6 ; D1.2 9.7,24 ; D1.2 8.5,25.3 ; 38.8,54.8 38.75,54.75 D3.2
  BOTTOM w0.5: J12.2 59.19,5.2 ; J12.2 57.79,3.8 ; J12.2 59.19,2.4 ; J12.2 60.59,3.8 ; C37.2 43.8,11.4 ; C37.2 40.2,11.4 ; C37.2 42,12.8 ; 63,23.2 C40.2 ; C40.2 64.8,21.8 ; C40.2 63,20.4 ; C40.2 61.2,21.8
  BOTTOM w0.8: 51.6,13.5 U5.3 51.6,17.1
  vias: v1(1.8,58.5) v1(2.4,10.8) v1(2.7,27.3) v1(3,73.9) v1(3.3,66) v1(3.7,18) v1(4,35.7) v1(4.1,12.5) v1(4.5,22.8) v1(4.8,53) v1(4.8,45.1) v1(4.9,39) v1(5.1,15.4) v1(5.2,47.8) v1(6.9,3.2) v1(8.3,8.7) v1(9,56.9) v1(10.9,10.9) v1(11.6,36.6) v1(11.7,43.5) v1(12.7,65.6) v1(14.1,13.8) v1(14.3,73.3) v1(14.9,50.6) v1(15.7,23.3) v1(15.7,19.9) v1(15.9,30.6) v1(16.1,26.4) v1(17.4,15.9) v1(17.4,2.8) v1(17.9,8.4) v1(19.4,13.2) v1(19.5,54.5) v1(19.6,68.4) v1(20.5,19.7) v1(20.7,36.2) v1(21.7,29.8) v1(22.7,39.9) v1(25.1,26.7) v1(25.3,52.2) v1(25.5,19.7) v1(25.7,73.5) v1(26.1,56.2) v1(26.1,23.2) v1(26.7,8) v1(27.1,65.1) v1(28.7,36.6) v1(30.1,8.6) v1(30.5,46.5) v1(30.6,42.4) v1(31.7,19.3) v1(33,21.9) v1(33.3,3) v1(33.4,57.2) v1(33.5,25.8) v1(35.1,63.9) v1(35.2,19.8) v1(36.1,10.7) v1(36.2,28.5) v1(37.1,36.7) v1(38.1,21.8) v1(38.1,14.3) v1(38.1,10.6) v1(38.9,57.1) v1(39,47.1) v1(39.1,73.2) v1(40.1,15.2) v1(40.1,9.7) v1(41.5,51.6) v1(42.1,15.5) v1(42.1,9.4) v1(42.6,42.6) v1(43.5,66.1) v1(44.1,15.5) v1(44.1,9.5) v1(45,56.5) v1(45.3,48.4) v1(46.1,15.5) v1(46.1,9.5) v1(47.9,62.2) v1(48,31.9) v1(51,33.2) v1(51.2,36.1) v1(52.3,17.8) v1(52.4,7) v1(53.3,42.1) v1(53.6,12.5) v1(55,37.4) v1(55,3) v1(55.7,67.6) v1(56,31.5) v1(56.1,48.6) v1(56.2,56.6) v1(56.2,52.6) v1(56.3,60.7) v1(56.6,45.6) v1(56.9,41.3) v1(58.5,12.6) v1(59.9,29.2) v1(59.9,22.5) v1(60.7,7.9) v1(62.7,58) v1(62.8,73.5) v1(63.5,67.2) v1(64.6,33.9) v1(64.9,48) v1(64.9,41.4) v1(65.2,19.3) v1(65.3,11.2) v1(65.4,26.8)
VBAT: length 134.7
  TOP w0.3: R9.1 v1(57.3,50.5)
  TOP w0.6: 45.6,35.95 45,36.55 U2.38 U2.39 46,36.35 45.6,35.95 ; 46,72 45.5,72.5 45,72 U2.63 U2.62 46,72
  TOP w1: 45.5,72.5 C27.1 ; 45.6,35.95 C34.1 C33.1
  TOP w1.2: v2(50.3,71.1) C28.1 C27.1 ; C33.1 v2(43.8,30.3)
  BOTTOM w0.3: 50.3,50.4 50.4,50.5 v1(57.3,50.5) ; R14.1 50.3,53.8
  BOTTOM w0.5: R32.1 D11.1 ; R29.1 R31.1
  BOTTOM w1: R29.1 U5.4
  BOTTOM w1.2: v2(50.3,71.1) 50.3,40 43.8,33.5 v2(43.8,30.3) 43.8,26.4 41,23.6 36.6,23.6 33.2,20.2 D11.1 C44.1 C37.1 49.4,17.9 49.9,17.4 U5.4
VDDA: length 10
  TOP w0.25: MCU1.22 12.1,20.8 10,18.7 C25.2 10,14.5
  TOP w0.3: L2.2 10,14.5
AI_ELS: length 11.8
  TOP w0.2: C21.1 v1(8.7,23.3) MCU1.17
  BOTTOM w0.2: R5.2 4.7,21.25 6.75,23.3 v1(8.7,23.3)
DI_DOOR: length 8.5
  TOP w0.3: J5.1 7.25,46.7 9.7,44.25 ISO1.1
DI_TTL_0: length 22.6
  TOP w0.2: MCU1.55 29.65,21.3 30.2,20.75 30.2,15.65 32.05,13.8 C18.2 33.1,5.5 J1.6
DI_TTL_1: length 21.5
  TOP w0.2: J1.5 35.84,6.4 35.1,7.14 C17.2 34.8,13.8 33.8,14.8 31.8,14.8 30.7,15.9 30.7,21 29.9,21.8 MCU1.56
DI_TTL_2: length 25.3
  TOP w0.2: MCU1.57 30.3,22.3 35.7,16.9 C16.2 37.1,4.04 J1.7
DI_TTL_3: length 24.7
  TOP w0.2: J1.4 38.38,6.4 39.1,7.12 C15.2 38.8,16.9 37.8,17.9 35.6,17.9 30.7,22.8 MCU1.58
DI_TTL_4: length 32
  TOP w0.2: MCU1.59 33.16,23.3 36.46,20 C14.2 41.1,8.6 39.8,7.3 39.8,3.88 J1.8
DI_TTL_5: length 31.5
  TOP w0.2: J1.3 43.1,7.48 C13.2 42.8,20 41.9,20.9 36.4,20.9 33.5,23.8 MCU1.60
DI_TTL_6: length 38.8
  TOP w0.2: MCU1.61 41.5,24.3 42.7,23.1 C12.2 45.1,8.7 42.3,5.9 42.3,3.92 J1.9
DI_TTL_7: length 38.8
  TOP w0.2: J1.2 47.1,8.94 C11.2 47.1,23.85 46.95,24 42.6,24 41.8,24.8 MCU1.62
FLASH_CS: length 14.3
  TOP w0.2: MCU1.77 26.5,35.7 25.2,37 25.2,42.9 v1(24.32,43.77)
  BOTTOM w0.2: U1.1 25.85,45.3 v1(24.32,43.77)
FLASH_MISO: length 13.1
  TOP w0.2: MCU1.79 25.5,35.2 24.18,36.52 24.18,41.52 v1(23.76,41.94)
  BOTTOM w0.2: U1.2 25.85,44.03 v1(23.76,41.94)
FLASH_MOSI: length 11.4
  TOP w0.2: v1(20.9,41.49) 20.9,39 25,34.9 MCU1.80
  BOTTOM w0.2: v1(20.9,41.49) U1.5
FLASH_SCK: length 14.9
  TOP w0.2: MCU1.78 26,35.5 24.7,36.8 24.7,42 23.94,42.76 v1(20.9,42.76)
  BOTTOM w0.2: v1(20.9,42.76) U1.6
MCU_DOOR: length 13.1
  TOP w0.2: C9.1 MCU1.1
  TOP w0.3: ISO1.4 9.7,37 7.3,34.6 R4.2 C9.1
MCU_I2C_SCL: length 13.5
  TOP w0.2: v1(9.8,41.2) 15.4,35.6 16.2,35.6 17.5,34.3 MCU1.95
  BOTTOM w0.2: U4.2 8.16,41.2 v1(9.8,41.2)
MCU_I2C_SDA: length 13.9
  TOP w0.2: MCU1.93 18.5,39.7 16.94,41.26 v1(13.4,41.26)
  BOTTOM w0.2: v1(13.4,41.26) U4.13
MCU_RS485_DIR: length 17.6
  TOP w0.2: U3.2 U3.3 13.5,5.74 12,7.24 12,19.5 12.3,19.8 MCU1.24
MCU_RS485_RX: length 15.5
  TOP w0.2: U3.1 14.7,3.2 15.5,4 15.5,7.7 15,8.2 MCU1.26
MCU_RS485_TX: length 12.6
  TOP w0.2: U3.4 14.1,7.61 13.25,8.46 MCU1.25
MCU_RX: length 35.4
  TOP w0.2: Q2.3 52.5,33.6 55.3,30.8 R18.1 55.3,28.5 53.3,26.5 35.11,26.5 33.31,28.3 MCU1.69
MCU_TX: length 36.1
  TOP w0.2: MCU1.68 33.11,27.8 34.81,26.1 58.6,26.1 62.3,29.8 R16.2
MCU_WAKE: length 5.7
  TOP w0.2: MCU1.67 31.2,27.3 v1(31.7,26.8)
  BOTTOM w0.2: R17.2 31.2,27.3 v1(31.7,26.8)
RELAY_0: length 16.7
  TOP w0.2: J2.6 18.1,4 18.1,6 21.5,9.4 MCU1.39
RELAY_1: length 13.4
  TOP w0.2: J2.5 19.34,6.4 22,9.06 MCU1.40
RELAY_2: length 16.1
  TOP w0.2: MCU1.41 22.5,8.4 20.6,6.5 20.6,4.04 J2.7
RELAY_3: length 12.7
  TOP w0.2: MCU1.42 23,6.42 J2.4
RELAY_4: length 15.4
  TOP w0.2: MCU1.43 23.5,6.3 23.2,6 23.2,3.98 J2.8
RELAY_5: length 12.4
  TOP w0.2: J2.3 24.42,6.4 24,6.82 MCU1.44
RELAY_6: length 15.8
  TOP w0.2: J2.9 25.7,4.02 25.7,5.9 24.5,7.1 MCU1.45
RELAY_7: length 13.1
  TOP w0.2: J2.2 25,7.26 MCU1.46
RST: length 42.1
  TOP w0.2: C20.1 8.2,24.8 MCU1.14 20.7,24.8 30,34.1 35.5,34.1 37.6,32 39.64,32 J3.6
  BOTTOM w0.2: J3.6 41.04,36.04 41,36.08 R2.2
SIM_CLK: length 13.8
  TOP w0.2: U2.19 24.1,45.8 24.72,46.42 v1(24.72,49.4)
  BOTTOM w0.2: v1(24.72,49.4) 29.52,54.2 R13.1
SIM_DATA: length 10.4
  TOP w0.2: v1(23.9,47.8) U2.17
  BOTTOM w0.2: v1(23.9,47.8) 24.2,47.8 28.6,52.2 R12.1
SIM_RST: length 10
  TOP w0.2: v1(23.9,46.8) U2.18
  BOTTOM w0.2: v1(23.9,46.8) 27.3,50.2 R10.1
SIM_RX: length 58
  TOP w0.2: R16.1 R21.2 64.9,31.7 66,32.8 66,38.6 65.5,39.1 53.9,39.1 48.7,44.3 48.7,56.8 40,65.5 U2.68
SIM_S_CLK: length 8.1
  BOTTOM w0.2: R13.2 32.9,54.5 33.8,55.4 D3.6 36.1,58.05 35.6,58.55 J6.7
SIM_S_DAT: length 9.8
  BOTTOM w0.2: J6.6 36.87,54.97 36.65,54.75 D3.5 35.15,54.75 32.9,52.5 R12.2
SIM_S_RST: length 11.8
  BOTTOM w0.2: J6.5 38.14,58.54 37.3,57.7 37.3,54.75 36.65,54.1 D3.4 36.05,54.1 35.64,53.69 35.64,53.24 32.9,50.5 R10.2
SIM_TX: length 48.9
  TOP w0.2: U2.71 37,67.8 48.2,56.6 48.2,44.2 53.7,38.7 63.6,38.7 64.4,37.9 R23.1
SIM_VDD: length 27.5
  TOP w0.3: v1(24,44.8) U2.20
  BOTTOM w0.3: v1(24,44.8) 28,48.8 33.8,48.8 38,53 D3.3 39.5,54.1 40.7,55.3 C30.2 40.7,59.08 40.68,59.1 J6.3
SIM_WAKE: length 71.9
  TOP w0.2: v1(50.6,38) 49.5,36.9 49.5,30 46.6,27.1 35.5,27.1 v1(34.4,28.2) ; v1(51.9,39.3) 47.7,43.5 47.7,56.3 36,68 U2.72
  BOTTOM w0.2: v1(51.9,39.3) v1(50.6,38) ; v1(34.4,28.2) 31.6,25.4 R17.1 R22.2
SWCLK: length 14
  TOP w0.2: v1(27.35,34.3) 27,33.95 MCU1.76
  BOTTOM w0.2: J3.2 35.06,34.3 v1(27.35,34.3)
SWDIO: length 13.1
  TOP w0.2: MCU1.72 v1(27.4,29.8)
  BOTTOM w0.2: v1(27.4,29.8) 37.02,29.8 J3.3
SWO: length 20.9
  TOP w0.2: J3.1 37.3,34.6 29.9,34.6 27.1,31.8 20.5,31.8 MCU1.89
USB+: length 9.7
  TOP w0.2: J11.3 8.5,58.8 10.6,56.7 R27.2 10.6,56.1 10,55.5 D9.1
USB-: length 8.3
  TOP w0.2: J11.2 9.85,59.45 10.6,58.7 ; 10.6,58.7 D10.1 ; 10.6,58.7 R26.2
USB_DN: length 12.4
  TOP w0.2: R26.1 12.5,58.1 17.8,52.8 U2.12
USB_DP: length 11.8
  TOP w0.2: U2.13 21.2,51.8 20.6,52.4 17.6,52.4 13.6,56.4 R27.1
VREF: length 7.8
  TOP w0.25: MCU1.21 10.5,21.3 8.6,19.4 C24.2
  TOP w0.3: L1.2 C24.2
N3822170: length 9.4
  BOTTOM w0.2: 48.7,8.5 48.7,13 48.2,13.5 U5.5
  BOTTOM w1: R29.2 R30.1
N4598241: length 16.7
  TOP w0.35: D6.2 11.8,49.3 9.8,51.3 9.1,51.3 3.4,57 3.4,59.3 4.2,60.1 J11.1
N4601647: length 6.5
  TOP w0.2: R19.1 62.5,37.57 ; R19.1 Q3.1 ; R19.1 R23.2
N4601708: length 5.8
  TOP w0.2: Q2.1 R20.1 Q3.3
N4604082: length 23.8
  TOP w0.3: U2.11 v1(44.9,53.8)
  BOTTOM w0.3: v1(44.9,53.8) R14.2
N4608034: length 2.2
  BOTTOM w0.5: R32.2 D12.2
N4608505: length 5.5
  TOP w0.3: U2.51 R15.1
N4608569: length 2
  TOP w0.3: R9.2 D2.2
N4608751: length 3.4
  TOP w0.3: Q1.3 D2.1
N4615628: length 7.5
  TOP w0.6: U2.82 J9.2
N4615862: length 2.7
  TOP w0.5: L3.2 R8.2
N4615877: length 12.3
  TOP w0.5: L3.1 C29.2
  TOP w0.6: J7.2 20.55,75.7 C29.2
N4616222: length 4.4
  TOP w0.6: C29.1 U2.79
N4618532: length 4.9
  TOP w0.3: U2.3 R11.2
N4620570: length 6.2
  TOP w0.6: U2.59 J8.2
N4627929: length 4.9
  TOP w0.2: MCU1.94 18,36.2 17,37.2 R1.2
N4628349: length 3.9
  TOP w0.25: MCU1.73 C10.2
N4629105: length 6.8
  TOP w0.25: R3.1 MCU1.37
N4629113: length 7.7
  TOP w0.25: MCU1.49 C23.2
N4630760: length 4.3
  BOTTOM w1.2: J12.1 F1.2
N4647441: length 4.4
  TOP w0.3: ISO1.2 4.5,43.8 3.5,42.8 R6.1
N4652652: length 12.5
  BOTTOM w0.2: R7.1 3.1,29 4.1,28 4.1,27.3 6,25.4 D1.1 6,25.2 4.7,23.9 3.84,23.9 J4.2 R5.1
N4656319: length 3.5
  TOP w0.2: U3.7 5.33,4.47 R24.1
N4656323: length 3.8
  TOP w0.2: U3.6 6.81,5.74 6.05,6.5 R25.1
N4656558: length 13.5
  TOP w0.2: R24.2 3.4,4.8 4.3,5.7 D4.2 4.5,8.8 5.2,9.5 5.2,13.5 J10.1
N4656597: length 8.2
  TOP w0.2: D4.1 4.1,10.7 ; 4.1,10.7 3.4,10 R25.2 ; 4.1,10.7 2.6,12.2 J10.2
N4660261: length 18.8
  BOTTOM w0.5: D5.1 D7.1 12.3,49.09 9.55,46.34 U4.6
N4660838: length 4.5
  BOTTOM w0.8: R28.1 D8.1
N4661685: length 11.5
  BOTTOM w0.8: 12.4,61.3 D7.2 R28.2 C36.1
N46081840: length 2.4
  TOP w0.3: R15.2 Q1.1

## Copper pours and planes (outline as drawn; the poured copper is in the pictures)
GND on TOP: 0.5,0.5 0.5,76.5 66.5,76.5 66.5,0.5 ; 28 cut-outs
GND on BOTTOM: 0.5,0.5 0.5,76.5 66.5,76.5 66.5,0.5 ; 6 cut-outs

## Text on the board
Ref Des/Silkscreen Bottom: v1.0 | SH-Z-003 | 20180805
Ref Des/Silkscreen Top: SWO | CLK | DIO | GND | RST | VCC
NCLEGEND-1-2: FIGURE | FINISHED_SIZE | 0.3 | 0.5 | 1.0 | 1.2 | 1.6 | 0.6 | DRILL CHART: TOP to BOTTOM | ALL UNITS ARE IN MILLIMETERS | PLATED | NON-PLATED | QTY | 137 | 4 | 32 | 1 | 2
